# Altium PCB PCB1.PcbDoc
Units mil, origin at the board's own origin, x right, y up, seen from the top; angles counter-clockwise.
Board outline 2000 x 1000 mil, 2 copper layers (Top Layer, Bottom Layer); 27 components, 51 nets, 153 pads, 45 vias.
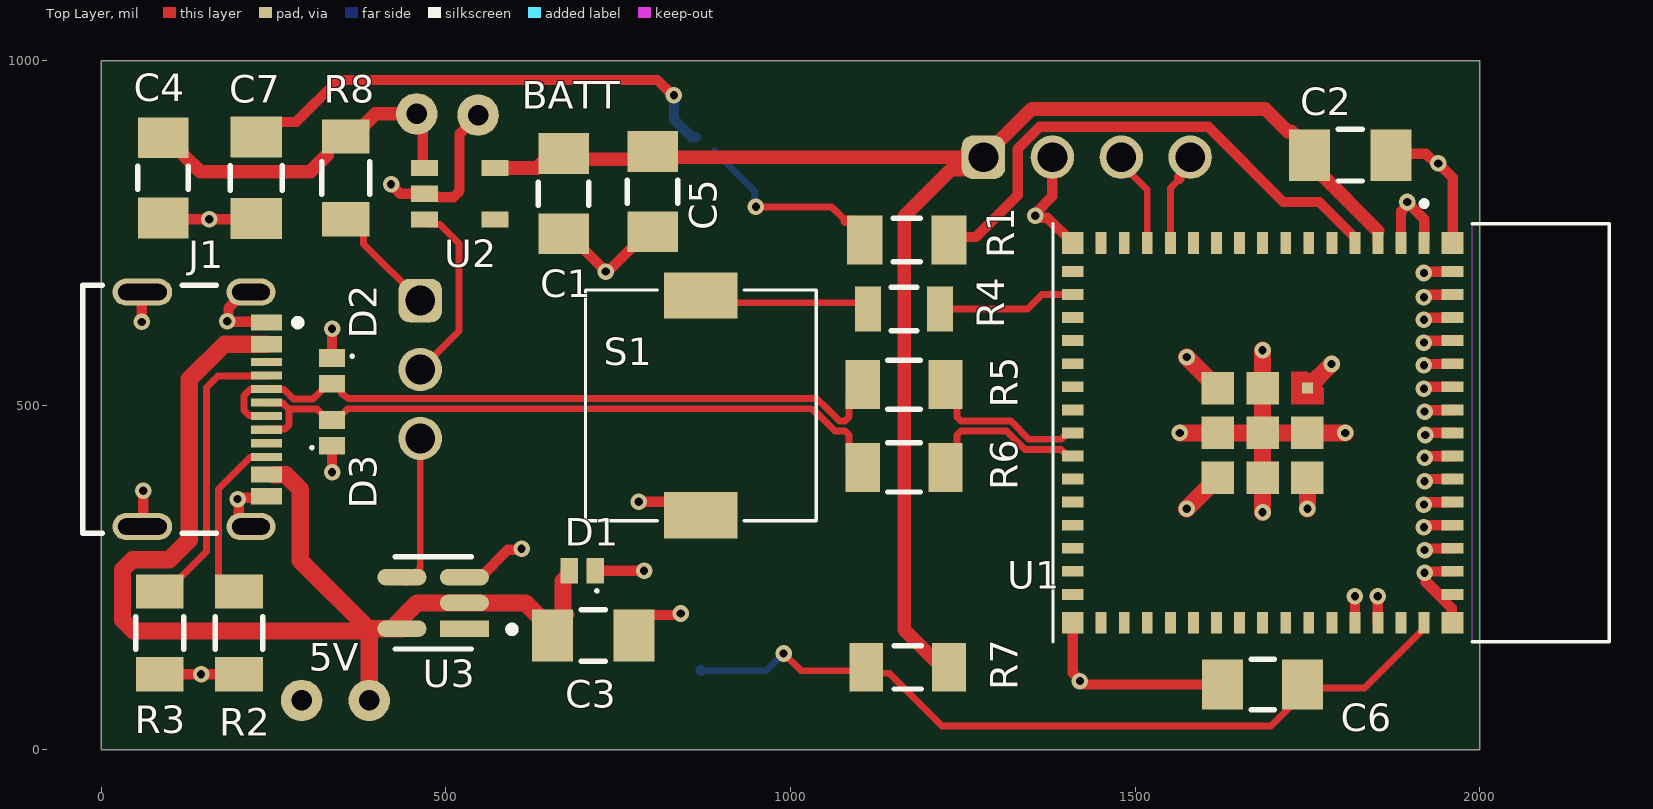
[diagram p0: Top Layer view]
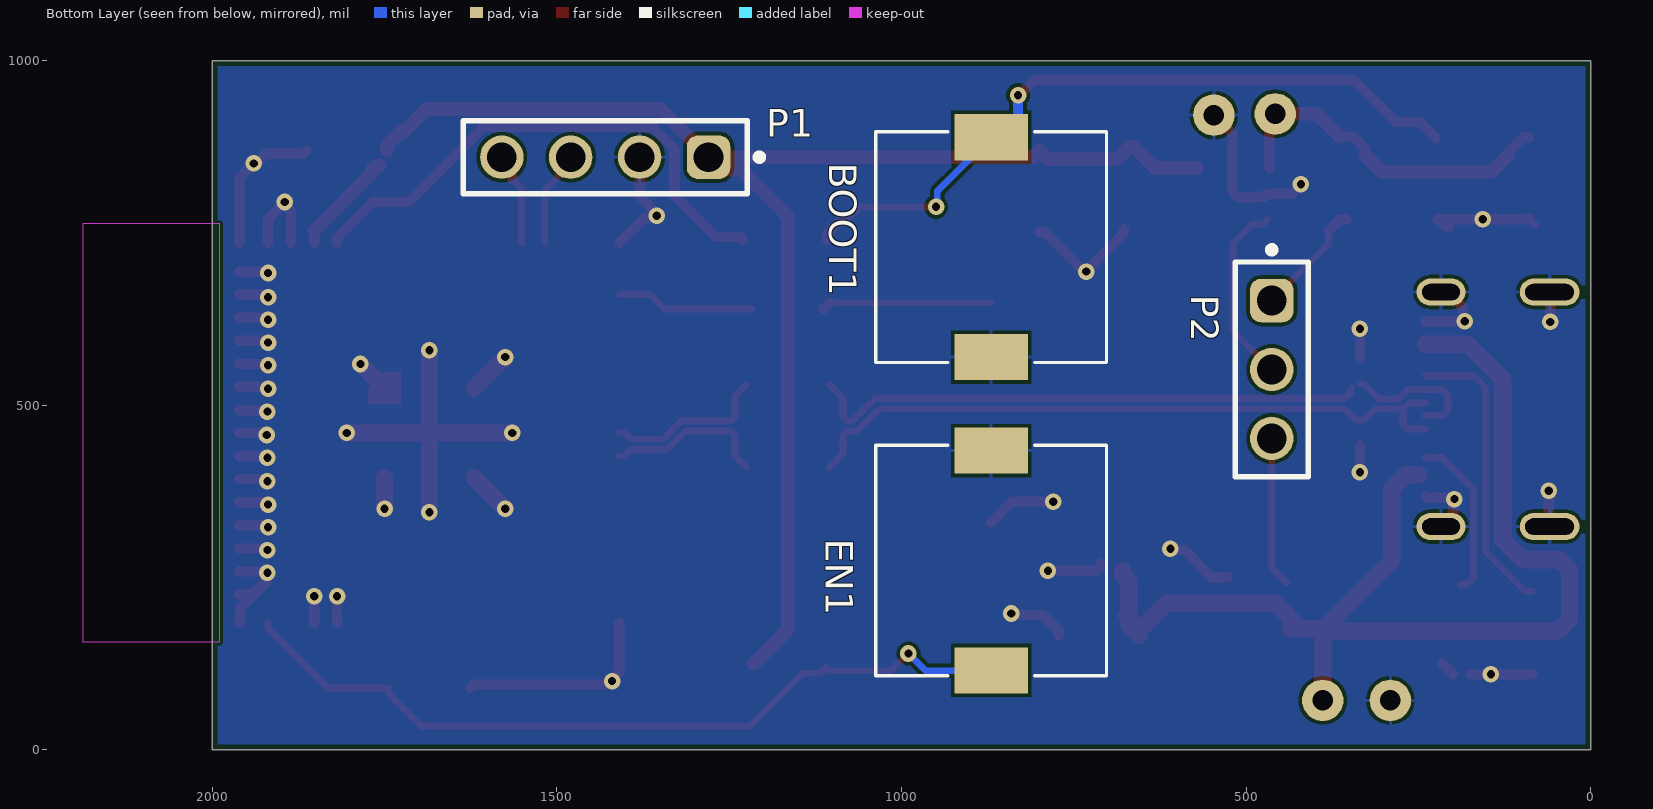
[diagram p1: Bottom Layer view, seen from below]
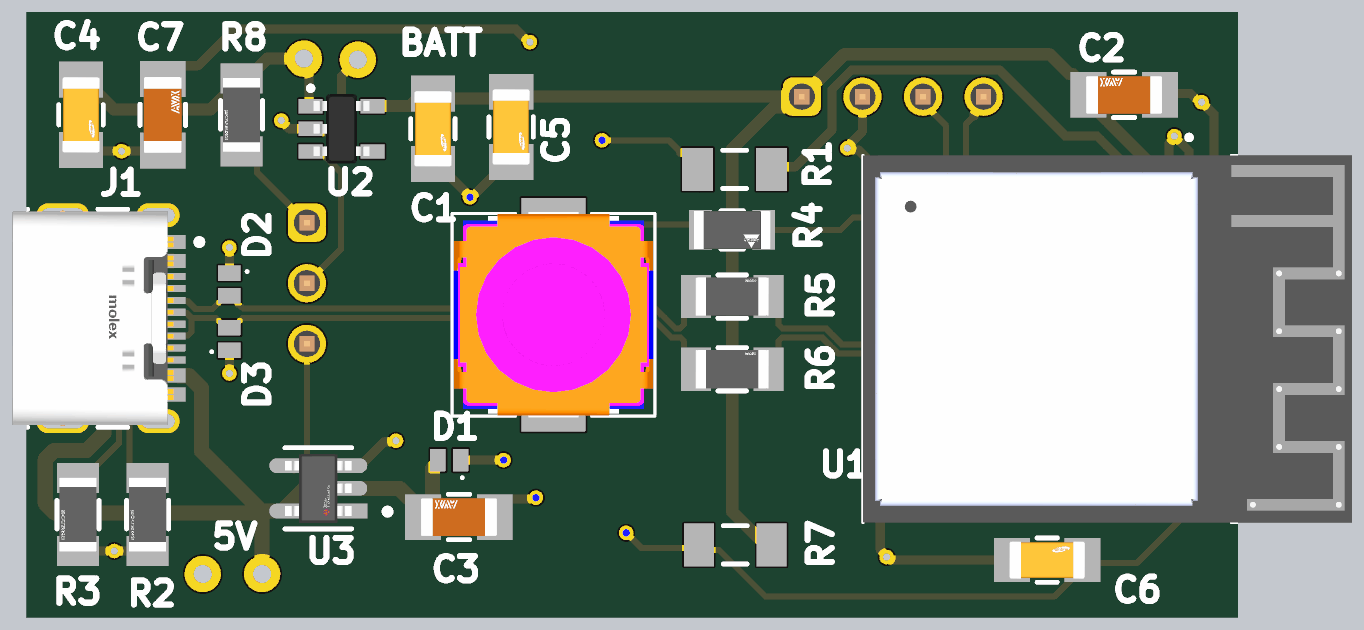
[diagram p2: 3D render of the assembled board from above, using the file's embedded part models]
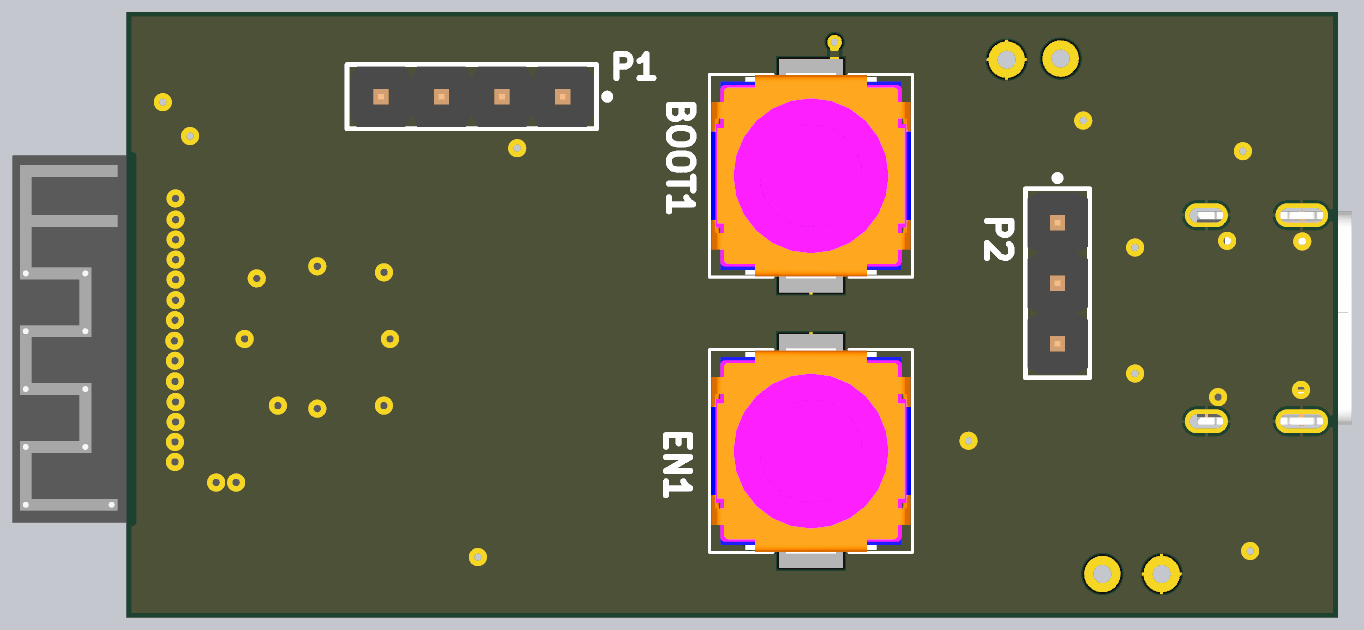
[diagram p3: 3D render of the assembled board from below, using the file's embedded part models]

## Layer stack, top to bottom
Top Solder: solder mask 0.4, Solder Resist, Dk 3.5
Top Layer: signal copper 1.4
Dielectric 1: dielectric 12.6, FR-4, Dk 4.8
Bottom Layer: signal copper 1.4
Bottom Solder: solder mask 0.4, Solder Resist, Dk 3.5

## Board outline
0,0 2000,0 2000,1000 0,1000

## Design rules (kind name [scope] priority, off if disabled: settings)
BoardOutlineClearance [All] p1: gap=7.87 ignorepadtopadclearanceinfootprint=FALSE
Clearance [All] p1: gap=5 ignorepadtopadclearanceinfootprint=FALSE except(9.84: Arc-Hole Track-Hole SMDPad-Hole THPad-Hole Via-Hole Fill-Hole Poly-Hole Region-Hole Text-Hole)
ComponentClearance [All] p1: gap=5 collisioncheckmode=3 verticalgap=5 showdistances=TRUE
DiffPairsRouting [All] p1: maxlimit=10 minlimit=5 mostfreqgap=5 toplayer_minwidth=5 toplayer_maxwidth=1000 toplayer_prefwidth=5 bottomlayer_minwidth=5 bottomlayer_maxwidth=1000 bottomlayer_prefwidth=5 maxuncoupledlength=500
Height [All] p1: minheight=0 maxheight=71497.94 prefheight=500
HoleSize [All] p1: absolutevalues=TRUE maxlimit=248.03 minlimit=11.81 maxpercent=80.000 minpercent=20.000
HoleToHoleClearance [All] p1: gap=9.84 allowstackedmicrovias=FALSE
MinimumAnnularRing [All] p1: minimumring=3
MinimumSolderMaskSliver [All] p1: minsoldermaskwidth=0
PlaneClearance [All] p1: clearance=5
PlaneConnect PlaneConnectPowerPads [InPadClass('PowerPads')] p1: planeconnectstyle=Direct reliefexpansion=20 reliefentries=4 reliefconductorwidth=10 reliefairgap=10
PlaneConnect [All] p2: pad.planeconnectstyle=Relief pad.reliefexpansion=11.81 pad.reliefentries=4 pad.reliefconductorwidth=5 pad.reliefairgap=5 via.planeconnectstyle=Direct via.reliefexpansion=11.81 via.reliefentries=4 via.reliefconductorwidth=5 via.reliefairgap=5
PolygonConnect PolygonConnectPowerPads [All vs (InPadClass('PowerPads'))] p1: connectstyle=Direct reliefconductorwidth=10 reliefentries=4 polygonreliefangle="90 Angle" airgapwidth=10
PolygonConnect [All] p2: thpad.connectstyle=Relief thpad.reliefconductorwidth=5 thpad.reliefentries=4 thpad.polygonreliefangle="90 Angle" thpad.airgapwidth=5 smdpad.connectstyle=Relief smdpad.reliefconductorwidth=5 smdpad.reliefentries=4 smdpad.polygonreliefangle="90 Angle" smdpad.airgapwidth=5 via.connectstyle=Direct via.reliefconductorwidth=5 via.reliefentries=4 via.polygonreliefangle="90 Angle" via.airgapwidth=5
RoutingVias [All] p1: holewidth=11.81 width=23.62 viastyle="Through Hole" minholewidth=11.81 minwidth=23.62 maxholewidth=23.62 maxwidth=259.84
SilkToSilkClearance [All] p1: silktosilkclearance=0
SilkToSolderMaskClearance [IsPad] p1: minsilkscreentomaskgap=5 clearancetoexposedcopper=TRUE
SolderMaskExpansion [All] p1: expansion=2.95 istentingtop=FALSE
SupplyNets "Schematic Supply Nets_3" [InNet('GND')] p1: voltage=0.000
SupplyNets "Schematic Supply Nets_2" [InNet('+3V3')] p2: voltage=0.000
SupplyNets "Schematic Supply Nets_1" [InNet('+5V_VBUS2')] p3: voltage=0.000
SupplyNets "Schematic Supply Nets" [InNet('+BATT')] p4: voltage=0.000
Width [All] p1: maxlimit=1000 minlimit=5 preferedwidth=5 minimp=50.000000 maximp=50.000000 favimp=50.000000
20 further rules are at their usual default settings.

## Classes and differential pairs
differential pair class DIFF90: CON2_USB ESP_USB
differential pair ESP_USB: +ESP_USB_P -ESP_USB_N
differential pair CON2_USB: +CON2_USB_P -CON2_USB_N

## Components (designator, comment, footprint, x,y, rotation, side; value= is the part's Value field where it differs from the comment)
BOOT1 "SKSTACE010" SW_SKSTACE010 870,729.45 r90 bottom
C1 "CL31A106KAHNNNE" FP-CL31-IPC_A 671,807 r270 top
C2 "12065C104JAT2A" FP-1206-L_3_2_0_2-W_1_6_0-IPC_A 1812,863 r180 top
C3 "12065C104JAT2A" FP-1206-L_3_2_0_2-W_1_6_0-IPC_A 713.93,166 r180 top locked
C4 "CL31B105KAHNNNE" FP-CL31-IPC_A 90,830 r270 top value=1µF
C5 "CL31B105KAHNNNE" FP-CL31-IPC_A 800,810 r270 top value=1µF
C6 "CL31B105KAHNNNE" FP-CL31-IPC_A 1685,95 r0 top value=1µF
C7 "12065C104JAT2A" FP-1206-L_3_2_0_2-W_1_6_0-IPC_A 225,830 r90 top
D1 "D5V0X1B2LPQ-7B" DFN70P101X50-2M2 698,260 r180 top
D2 "D5V0X1B2LPQ-7B" DFN70P101X50-2M2 335,550 r270 top
D3 "D5V0X1B2LPQ-7B" DFN70P101X50-2M2 335,460 r90 top
EN1 "SKSTACE010" SW_SKSTACE010 870,275 r270 bottom
J1 "217179-0001" FP-2171790001-MFG 105.16,494.21 r270 top
P1 "61300411121" 61300411121 1430,860 r0 bottom
P2 "61300311121" 61300311121 463,552 r270 bottom
R1 "CRCW120627R0FKEA" RESC3216X60X45ML10T20 1168.98,740 r0 top locked
R2 "CR1206-FX-5101ELF" FP-CR1206-IPC_A 200,170 r270 top
R3 "CR1206-FX-5101ELF" FP-CR1206-IPC_A 85,170 r270 top
R4 "CRCW1206200RFKEA" FP-CRCW1206-e3-IPC_C 1165,640 r0 top
R5 "RC1206JR-070RL" FP-RC1206-IPC_A 1165,530 r0 top value=0Ω
R6 "RC1206JR-070RL" FP-RC1206-IPC_A 1165,410 r0 top value=0Ω
R7 "RC1206FR-0710KL" RESC3116X65X40ML10T20 1170,120 r0 top
R8 "CR1206-FX-5101ELF" FP-CR1206-IPC_A 355,830 r270 top
S1 "SKSTACE010" SW_SKSTACE010 870,500 r90 top
U1 "ESP32-S3-MINI-1-N8" XCVR_ESP32-S3-MINI-1-N8 1685.04,460 r270 top
U2 "XC6220B331MR" SOT23-5 469,807 r270 top
U3 "SN74LV1T04DBVR" FP-DBV0005A-IPC_A 481.71,213.4 r180 top

## Footprints (in the part's own frame and the unit in brackets; to place one, negate y for a bottom-side part, rotate by r counter-clockwise, add the part's x,y. Pads: shape width x height; smd on the part's side, far side on the other; paste and mask are expansions set on the pad)
61300311121 [mm] "Pin Header, pitch 2.54 mm, THT, Vertical, single row, 3p"
  rrect50% 1.6x1.6 hole 1.1: 1(-2.54,0)
  round 1.6 hole 1.1: 2(0,0) 3(2.54,0)
  silkscreen extent -4.53,-1.35 3.96,1.35, body extent -3.81,-1.27 3.81,1.27, height 8.57
61300411121 [mm] "Pin Header, pitch 2.54 mm, THT, Vertical, single row, 4p"
  rrect50% 1.6x1.6 hole 1.1: 1(-3.81,0)
  round 1.6 hole 1.1: 2(-1.27,0) 3(1.27,0) 4(3.81,0)
  silkscreen extent -5.8,-1.35 5.23,1.35, body extent -5.08,-1.27 5.08,1.27, height 8.57
DFN70P101X50-2M2 [mm] "DFN, 2-Leads, Body 0.61x1.01mm, Pitch 0.70mm, IPC Low Density"
  rect 0.65x0.95 smd: 1(-0.475,0) 2(0.475,0)
  silkscreen extent -0.59,0.69 -0.49,0.79, body extent -0.54,-0.34 0.54,0.34, height 0.5
FP-1206-L_3_2_0_2-W_1_6_0-IPC_A [mil]
  rect 59.24x75.05 smd paste+0 mask+0: 1(-59.09,0) 2(59.09,0)
  silkscreen extent -18,-38 18,38, body extent -108,-57 108,57, height 10
FP-2171790001-MFG [mm]
  rect 0.6x1.15 smd paste+0 mask+0: A1B12(-3.2,3.425) A4B9(-2.4,3.425) B1A12(3.2,3.425) B4A9(2.4,3.425)
  rect 0.3x1.15 smd paste+0 mask+0: A5(-1.25,3.425) A6(-0.25,3.425) A7(0.25,3.425) A8(1.25,3.425) B5(1.75,3.425) B6(0.75,3.425) B7(-0.75,3.425) B8(-1.75,3.425)
  rrect100% 1x1.8 hole 1.4 slot 0.6 at 0 deg paste-2539.97 mask+0: S1(-4.32,2.85) S2(4.32,2.85)
  rrect100% 1x2.2 hole 1.8 slot 0.6 at 0 deg paste-2539.97 mask+0: S3(-4.32,-1.15) S4(4.32,-1.15)
  silkscreen extent -4.57,-3.35 4.57,4.7, body extent -4.47,-3.25 4.47,3.5, height 3.36
FP-CL31-IPC_A [mil]
  rect 59.27x73.16 smd paste+0 mask+0: 1(-58.12,0) 2(58.12,0)
  silkscreen extent -17,-37 17,37, body extent -107,-56 107,56, height 10
FP-CR1206-IPC_A [mil]
  rect 49.53x69.38 smd paste+0 mask+0: 1(-60.12,0) 2(60.12,0)
  silkscreen extent -24,-35 24,35, body extent -105,-54 105,54, height 10
FP-CRCW1206-e3-IPC_C [mil]
  rect 37.64x65.28 smd paste+0 mask+0: 1(-52.21,0) 2(52.21,0)
  silkscreen extent -19,-31 19,31, body extent -75,-38 75,38, height 10
FP-DBV0005A-IPC_A [mm]
  rect 1.805x0.612 smd paste+0 mask+0: 1(-1.15,0.95)
  rrect100% 1.805x0.612 smd paste+0 mask+0: 2(-1.15,0) 3(-1.15,-0.95) 4(1.15,-0.95) 5(1.15,0.95)
  silkscreen extent -3.03,-1.7 1.4,1.7, body extent -2.55,-1.95 2.55,1.95, height 0.25
FP-RC1206-IPC_A [mil]
  rect 49.53x71.34 smd paste+0 mask+0: 1(-60.12,0) 2(60.12,0)
  silkscreen extent -24,-36 24,36, body extent -105,-55 105,55, height 10
RESC3116X65X40ML10T20 [mm] "Chip Resistor, 2-Leads, Body 3.10x1.60mm, IPC Low Density"
  rect 1.25x1.8 smd: 1(-1.525,0) 2(1.525,0)
  silkscreen extent -0.5,-0.8 0.5,0.8, body extent -1.6,-0.85 1.6,0.85, height 0.65
RESC3216X60X45ML10T20 [mm] "Chip Resistor, 2-Leads, Body 3.20x1.60mm, IPC Low Density"
  rect 1.3x1.8 smd: 1(-1.55,0) 2(1.55,0)
  silkscreen extent -0.5,-0.8 0.5,0.8, body extent -1.65,-0.85 1.65,0.85, height 0.6
SOT23-5 [mm] "SOT143-4 as used in SP0503BAHTG"
  round 0.4 on Top Overlay: 1(-1.7,0)
  rect 0.6x1 smd: 1(-0.95,0) 2(0,0) 3(0.95,0) 4(0.95,2.6) 5(-0.95,2.6)
  body extent -1.46,0.13 1.46,2.47, height 1
SW_SKSTACE010 [mm]
  rect 1.7x2.7 smd: 1(-4.05,0) 2(4.05,0)
  silkscreen extent -4.25,-4.25 4.25,4.25, body extent -4.3,-4.2 4.3,4.2, height 3.95
XCVR_ESP32-S3-MINI-1-N8 [mm]
  rect 0.8x0.4 smd: 1(-7,5.95) 2(-7,5.1) 3(-7,4.25) 4(-7,3.4) 5(-7,2.55) 6(-7,1.7) 7(-7,0.85) 8(-7,0) 9(-7,-0.85) 10(-7,-1.7) 11(-7,-2.55) 12(-7,-3.4) 13(-7,-4.25) 14(-7,-5.1) 15(-7,-5.95) 31(7,-5.95) 32(7,-5.1) 33(7,-4.25) 34(7,-3.4) 35(7,-2.55) 36(7,-1.7) 37(7,-0.85) 38(7,0) 39(7,0.85) 40(7,1.7) 41(7,2.55) 42(7,3.4) 43(7,4.25) 44(7,5.1) 45(7,5.95)
  rect 0.4x0.8 smd: 16(-5.95,-7) 17(-5.1,-7) 18(-4.25,-7) 19(-3.4,-7) 20(-2.55,-7) 21(-1.7,-7) 22(-0.85,-7) 23(0,-7) 24(0.85,-7) 25(1.7,-7) 26(2.55,-7) 27(3.4,-7) 28(4.25,-7) 29(5.1,-7) 30(5.95,-7) 46(5.95,7) 47(5.1,7) 48(4.25,7) 49(3.4,7) 50(2.55,7) 51(1.7,7) 52(0.85,7) 53(0,7) 54(-0.85,7) 55(-1.7,7) 56(-2.55,7) 57(-3.4,7) 58(-4.25,7) 59(-5.1,7) 60(-5.95,7)
  rect 1.2x1.2 smd: 61(0,0) 67(0,1.65) 68(1.65,1.65) 69(-1.65,0) 70(1.65,0) 71(-1.65,-1.65) 72(0,-1.65) 73(1.65,-1.65)
  rect 0.8x0.8 smd: 62(-7,7) 63(-7,-7) 64(7,-7) 65(7,7)
  rect 0.4x0.4 smd paste-1 mask+0: 66(-1.65,1.65)
  Top Layer region: -1.05,1.05 -2.25,1.05 -2.25,1.65 -1.65,2.25 -1.05,2.25
  Keep-Out Layer region: 7.7,7.725 -7.7,7.725 -7.7,12.775 7.7,12.775
  Keep-Out Layer region: 7.7,7.725 -7.7,7.725 -7.7,12.775 7.7,12.775
  silkscreen extent -8.55,-7.73 7.7,12.78, body extent -7.7,-7.73 7.7,12.78, height 2.55

## Part data
BOOT1 EN1 S1: "Switch Tactile N.O. SPST Round Button J-Bend 0.05A 16VDC 500000Cycles 4N SMD T/R", Package=None, Availability=Unavailable, MP=SKSTACE010, Price=None
C1: library part CMP-2000-06107-2, "Cap Ceramic 10uF 25V X5R ±10% SMD 1206 +85°C Embossed T/R", Capacitance=10uF, Case Code (Imperial)=1206, Case Code (Metric)=3216, Dielectric=X5R, Max Operating Temperature=85°C, Min Operating Temperature=-55°C, Tolerance=10%, Voltage=25V, Case/Package=1206, Contact Plating=Tin, Depth=1.6mm, Height=1.6mm, Lead Free="Lead Free", Length=3.2mm, Material=Ceramic, Mount="Surface Mount", Packaging="Tape and Reel", Radiation Hardening=No, Thickness=0.071inch, Voltage Rating=25V, Voltage Rating (DC)=25V, Width=0.063inch
C2 C3 C7: library part CMP-04427-019132-1, "General Purpose Ceramic Capacitor, 1206, 100nF, 5%, X7R, 15%, 50V", Capacitance=100nF, Case Code (Imperial)=1206, Case Code (Metric)=3216, Dielectric=X7R, Dielectric Material=Ceramic, Insulation Resistance=100GR, Max Operating Temperature=125°C, Min Operating Temperature=-55°C, Package Quantity=4000, Tolerance=5%, Voltage=50V, Case/Package=1206, Contact Plating=Tin, Depth=1.6mm, Dissipation Factor=2.5%, Height=0.5mm, Lead Free="Lead Free", Length=3.2mm, Mount="Surface Mount", Packaging="Cut Tape", Radiation Hardening=No, REACH SVHC="No SVHC", RoHS Compliant=Yes, Series=X7R, Termination=SMD/SMT, Thickness=0.037inch, Voltage Rating=50V, Voltage Rating (DC)=50V, Weight=0.000571oz, Width=1.6mm
C4 C5 C6: library part CMP-001-00086-1, "Ceramic Capacitor, Multilayer, Ceramic, 25V, 10% +Tol, 10% -Tol, X7R, 15% TC, 1uF, Surface Mount, 1206", Capacitor Type=Ceramic, Case/Package=1206, Max Operating Temperature=125°C, Min Operating Temperature=-55°C, Mounting Technology="Surface Mount", Pins=2, RoHS Compliant=Yes
D1 D2 D3: "TVS Diode - ULTRA LOW CAPACITANCE BIDIRECTIONAL"
J1: "CONN RCP USB2.0 TYP C 24P SMD RA", LCSC Part Number=C3197684, Manufacturer=Molex, Supplier Part Number=900-2171790001CT-ND, Category=Connectors, Manufacturer Part Number=217179-0001, Pricing="1=0.9, 10=0.745, 100=0.6212 (USD)", RoHS=No, Stock=7228, Supplier=Digikey
P1: library part CMP-1502-01064-3, Color=Black, Contact Resistance=20mΩ, Current Rating=3A, Max Operating Temperature=105°C, Min Operating Temperature=-40°C, Operating Supply Voltage=250V, Connector Type="Male Pin", Contact Material=Copper, Contact Mating Length=5.9944mm, Contact Plating=Gold, Gender=Male, Height=8.89mm, Lead Free="Lead Free", Lead Pitch=2.54mm, Mount="Through Hole", NexarPartId=32855522, Number of Contacts=4, Number of Pins=4, Number of Positions=4, Number of Rows=1, Orientation=Vertical, Packaging=Bulk, Pitch=2.54mm, REACH SVHC=Unknown, RoHS=Compliant, Termination=Solder, Voltage Rating=250V
P2: library part CMP-1502-01062-3, Color=Black, Contact Resistance=20mΩ, Current Rating=3A, Max Operating Temperature=105°C, Min Operating Temperature=-40°C, Operating Supply Voltage=250V, Connector Type="Male Pin", Contact Material=Copper, Contact Mating Length=5.9944mm, Contact Plating=Gold, Gender=Male, Height=8.94mm, Lead Free="Lead Free", Lead Pitch=2.54mm, Mount="Through Hole", NexarPartId=32855521, Number of Contacts=3, Number of Pins=3, Number of Positions=3, Number of Rows=1, Orientation=Vertical, Packaging=Bulk, Pitch=2.54mm, REACH SVHC=Unknown, RoHS=Compliant, Termination=Solder, Voltage Rating=250V
R1: library part CMP-2003-02015-1, "750mW Thick Film Resistors 200V ±1% ±100ppm/℃ 27Ω 1206 Chip Resistor - Surface Mount ROHS", Manufacturer="Vishay Dale", Resistance=27ohm, Part Number=CRCW120627R0FKEA
R2 R3 R8: library part CMP-07231-005130-1, "Thick Film Chip Resistors 1206 5.1kΩ 0.25W 1% 100ppm/°C", Case Code (Imperial)=1206, Case Code (Metric)=3216, Max Operating Temperature=155°C, Max Power Dissipation=250mW, Min Operating Temperature=-55°C, Package Quantity=1, Resistance=5.1kR, Temperature Coefficient=100ppm/°C, Tolerance=1%, Voltage Rating=200V, Case/Package=1206, Composition="Thick Film", Contact Plating=Tin, Depth=1.6mm, Features="Moisture Resistant", Height=0.03inch, Length=3.2mm, Military Standard=Not, Mount="Surface Mount", Number of Terminations=2, Packaging="Tape and Reel", Power Rating=250mW, Radiation Hardening=No, Termination=SMD/SMT, Thickness=610um, Width=0.063inch
R4: library part CMP-2003-01935-2, "RES Thick Film, 200Ω, 1%, 0.25W, 100ppm/°C, 1206", Case Code (Imperial)=1206, Case Code (Metric)=3216, Max Operating Temperature=155°C, Max Power Dissipation=250mW, Min Operating Temperature=-55°C, Package Quantity=10, Resistance=200R, Temperature Coefficient=100ppm/°C, Tolerance=1%, Voltage Rating=200V, Case/Package=1206, Composition="Thick Film", Contact Plating=Tin, Depth=1.6mm, Features="Automotive AEC-Q200", Height=0.55mm, Lead Free="Lead Free", Length=3.2mm, Military Standard=Not, Number of Pins=2, Number of Terminations=2, Packaging="Tape and Reel", Power Rating=250mW, Radiation Hardening=No, Termination=SMD/SMT, Voltage Rating (DC)=200V, Weight=0.000353oz, Width=1.6mm, Working Voltage=200V
R5 R6: library part CMP-2100-03681-2, "RES SMD 0 OHM JUMPER 1/4W 1206", Manufacturer=YAGEO, Package=RC1206, Power Rating=0.25W, Resistance=0Ω, Temperature="-55°C to +155°C", Temperature Coefficient=300ppm/°C, Temperature Range High=+155°C, Temperature Range Low=-55°C, Tolerance=5%, Voltage Rating=200V, Automotive=No, Category=Res, ComponentLink2Description=Datasheet, ComponentLink2URL=https://www.yageo.com/upload/media/product/productsearch/datasheet/rchip/PYu-RC_Group_51_RoHS_L_10.pdf, Composition="Thick Film", Device Class L1="Passive Components", Device Class L2=Resistors, Device Class L3="Chip SMD Resistors", Digikey Description="RES SMD 0 OHM JUMPER 1/4W 1206", Footprint Url=https://www.yageo.com/upload/website/yageo_PYu-R_Mount_10_19050818_343.pdf, Height=0.65mm, Ipc Land Pattern Name=RESC310160X55, Lead Free=Yes, Manufacturer Part Number=RC1206JR-070RL, Mouser Description="Resistor: thick film; SMD; 1206; 0O; 0.25W; ±5%; -55÷155°C", Octopart=https://octopart.com/rc1206jr-070rl-yageo-40025601, RoHS=TRUE, Series=RC
R7: library part CMP-1014-00623-2, "Chip Resistor, 10 KOhm, +/- 1%, 0.25 W, -55 to 155 degC, 1206 (3216 Metric), RoHS, Tape and Reel", Case Code (Imperial)=1206, Case Code (Metric)=3216, Manufacturer=Yageo, Max Operating Temperature=155degC, Min Operating Temperature=-55degC, Package Description="2-Pin Surface Mount Device, Body 3.1 x 1.6 mm", Package Quantity=5000, Package Reference=1206.0, Power Rating=250mW, Resistance=10KOhm, Temperature Coefficient=100ppm/degreesC, Tolerance=1%, Voltage Rating=200V, Case/Package=1206, Composition=ThickFilm, Datasheet URL=http://www.yageo.com/NewPortal/yageodocoutput?fileName=/pdf/R-Chip/PYu-RC_Group_51_RoHS_L_5.pdf, Datasheet Version="Rev. 5, 10/2016", Depth=1.6mm, Height=0.55mm, Lead Free=LeadFree, Length=3.1mm, Manufacturer URL=http://www.yageo.com/, Military Standard=Not, Packaging=TapeandReel, REACH SVHC=Unknown, RoHSCompliant=true, Termination=SMD/SMT, Width=1.6mm
U1: "SMD Module, ESP32-S3FN8, 8 mb Sp", LCSC Part Number=C2913206, Manufacturer="Espressif Systems", Supplier Part Number=1965-ESP32-S3-MINI-1-N8CT-ND, Category=LDO, Manufacturer Part Number=ESP32-S3-MINI-1-N8, Pricing="1=3.1 (USD)", RoHS=No, Stock=2024, Supplier=Digikey
U2: "LDO - 70dB@(1kHz) 900mA Fixed 3.3V Positive electrode 5.5V SOT-23-5 Voltage Regulators - Linear, Low Drop Out (LDO) Regulators ROHS"
U3: library part CMP-0859-00120-4, "IC INVERTER 1CH 1-INP SOT23-5", Case/Package=SOT-23-5, High Level Output Current=8mA, Max Operating Temperature=125°C, Max Supply Voltage=5.5V, Min Operating Temperature=-40°C, Min Supply Voltage=1.8V, Package Quantity=3000, Quiescent Current=1uA, Lead Free="Lead Free", Logic Function=Inverter, Low Level Output Current=8mA, Mount="Surface Mount", Number of Bits=1, Number of Channels=1, Number of Circuits=1, Number of Inputs=1, Number of Pins=5, Packaging="Tape and Reel", Propagation Delay=7ns, Radiation Hardening=No, REACH SVHC="No SVHC", RoHS Compliant=Yes, Weight=0.001058oz

## Free pads (board coordinates)
  round 60 hole 30: 6(457.91,922.88) 7(547,921) 10(291,72) 11(389,72)

## Via types
v1: diameter 24, hole 12, Top Layer to Bottom Layer, 45 vias

## Nets (pads, with @x,y where several pads share a name; then routed paths per layer and width w, separated by ;. In a path a pad name is that pad's centre, name@x,y a point inside that pad or via, vN(x,y) a via of type N, cw(c..) or ccw(c..) an arc to the next point about the centre after c; other vN are vias at no path point)
+3V3: C1.1 C2.2 C5.1 P1.1 R7.2 U1.3 U2.5 | length 2255.8
  Top Layer w15: P1.1@1256.63,860 1260.68,855.95 P1.1@1260.68,847.2 ; 1851.99,753.05 1851.99,735.96 U1.3
  Top Layer w20: U2.5 632.41,844.4 662.1,874.09 670,874.09 687.09,857 787.94,857 800,869.06 809.06,860 1256.63,860 1270.94,860 P1.1 ; R7.2@1215,125 1165,175 1165,774 1233.05,842.05 1258.94,842.05 1260.68,843.79 P1.1@1260.68,847.2 ; P1.1@1256.63,869.06 1270.94,869.06 P1.1 ; C2.2@1746.93,870 1746.93,876.89 1726.42,897.4 1721.42,897.4 1688.82,930 1350,930 P1.1 ; C2.2@1756.93,848.11 1761.93,848.11 1767.44,842.6 1767.44,837.6 1851.99,753.05
+5V_VBUS2: C3.2 D1.2 J1.A4B9 J1.B4A9 pad.11 U3.2 U3.5 | length 1754.6
  Top Layer w15: C3.2@655.86,166 C3.2@655.86,172.89 ; C3.2@666.56,183.59 670,187.03 C3.2@679.3,196.33
  Top Layer w25: J1.A4B9 178.95,588.7 128,537.75 128,305 99,276 45.64,276 31,261.36 31,189 47.26,172.74 386.87,172.74 ; J1.B4A9@250.14,399.4 268.03,399.4 289,378.43 289,274.74 389,174.74 ; pad.11 389,174.74 ; U3.5 U3.5@421.34,176 ; C3.2@655.86,166 670,180.14 670,187.03 670,244.8 679,253.8 679,259.7 D1.2 ; C3.2@655.86,172.89 615.35,213.4 U3.2 458.74,213.4 U3.5@421.34,176 ; 389,174.74 390.26,176 U3.5@421.34,176
+BATT: C4.1 pad.6 R8.1 U2.1@469,844.4 | length 513.7
  Top Layer w15: C4.1@90,889.06 97.87,889.06 119.9,867.03 C4.1@119.9,862.79 ; 327.81,862.93 327.81,872.85 345.08,890.12 R8.1 R8.1@364.92,890.12 ; pad.6 466.52,914.27 U2.1@466.52,844.4
  Top Layer w20: C4.1@119.9,862.79 143.69,839 303.88,839 327.81,862.93 ; R8.1@364.92,890.12 397.72,922.92 406.01,922.92 414.29,922.92 pad.6
BTN_GPIO0: BOOT1.2 C7.2 R1.1 | length 1016.6
  Top Layer w10: v1(950,788) 1059.95,788 1080.02,767.93
  Top Layer w15: C7.2@225,888.07 248.01,911.08 283.08,911.08 344,972 807,972 v1@830,949 ; 1080.02,767.93 1089.86,767.93 1107.95,749.84 R1.1
  Bottom Layer w10: BOOT1.2@889.68,868.9 948.28,810.3 v1@948.28,789.72
  Bottom Layer w15: v1(831,950) 831,914.86 856.96,888.9 BOOT1.2@862.96,888.9 ; v1@948.28,789.72 v1(950,788)
CHIP_PU: C6.2 EN1.2 R7.1 U1.45 | length 1171.6
  Top Layer w10: v1(990,140) 1015,115 R7.1@1104.96,115 ; R7.1 1118.67,111.29 1143.71,111.29 1220,35 1696.93,35 1744.06,82.13 1744.06,90 1832.76,90 1919.29,176.54 U1.45
  Bottom Layer w10: EN1.2@870.55,115 965,115 v1(990,140)
  Bottom Layer w15: EN1.2 EN1.2@870.55,115
CON2_USB_N: D2.2 J1.A7 J1.B7 R5.1 | length 1021.8
  Top Layer w10: J1.A7 239.09,485.28 214.72,485.28 207.36,492.64 207.36,514.1 216.09,522.83 239.09,522.83 J1.B7 240.91,522.83 265.43,522.83 278.85,509.42 307.21,509.42 329.09,531.3 D2.2 ; D2.2@347.2,525 348.7,523.5 348.7,517.2 358.9,510 1037.99,510 1053.28,495.18 cw(c1035.89,477.22) 1053.52,494.96 cw(c1042.96,484.3) 1053.57,494.91 1070.97,477.5 1079.26,477.5 1085.12,483.36 1085.12,510.23 R5.1
CON2_USB_P: D3.2 J1.A6 J1.B6 R6.1 | length 990.9
  Top Layer w10: J1.B6 240.91,465.59 266.78,465.59 272.64,471.45 272.64,494.42 ; J1.A6 240.91,503.15 263.91,503.15 267.06,500 272.64,494.42 ; R6.1 1085.12,429.77 1085.12,456.64 1079.26,462.5 1064.76,462.5 1042.96,484.3 ccw(c1035.89,477.22) 1042.85,484.41 1039.18,487.96 1030.08,495 357.2,495 340.91,478.7 329.09,478.7 313.38,494.42 272.64,494.42
ESP_USB_N: R5.2 U1.23 | length 238.9
  Top Layer w10: R5.2 1241.65,513.46 1241.65,483.36 1247.51,477.5 1319.68,477.5 1346.42,450.77 1392.84,450.77 1398.7,456.63 1398.7,457.13 1401.57,460 U1.23
ESP_USB_P: R6.2 U1.24 | length 238.9
  Top Layer w10: R6.2 1241.65,426.54 1241.65,456.64 1247.51,462.5 1313.47,462.5 1340.2,435.77 1392.84,435.77 1398.7,429.91 1398.7,429.41 1401.57,426.54 U1.24
GND: BOOT1.1 C1.2 C2.1 C3.1 C4.2 C5.2 C6.1 C7.1 D1.1 D2.1 D3.1 EN1.1 J1.A1B12 J1.B1A12 J1.S1 J1.S2 J1.S3 J1.S4 P1.2 pad.7 pad.10 R2.2 R3.2 S1.1 U1.1 U1.2 U1.42 U1.43 U1.46 U1.47 U1.48 U1.49 U1.50 U1.51 U1.52 U1.53 U1.54 U1.55 U1.56 U1.57 U1.58 U1.59 U1.60 U1.61 U1.62 U1.63 U1.64 U1.65 U1.66 U1.67 U1.68 U1.69 U1.70 U1.71 U1.72 U1.73 U2.2 U3.3 | length 3812.3
  Top Layer w10: C4.2@80,760.94 90,770.94 C4.2@97.87,770.94 ; C7.1@212.48,759.41 223.07,770 C7.1@225,771.93
  Top Layer w15: v1(59,621) 59,663.41 J1.S3 ; J1.S4 61,325.25 v1(61,376) ; R3.2 85.12,110 v1(145,110) R2.2@175.02,110 ; C4.2@90,770.94 90.94,770 v1(157,770) C7.1@223.07,770 ; R2.2 R2.2@215,124.88 ; C7.1@205.59,759.41 C7.1@212.48,759.41 ; J1.S2 210.98,324.13 199.72,335.39 199.72,362.28 v1(198,364) 199.72,365.72 237.49,365.72 J1.B1A12 ; J1.S1 208.21,664.29 184.72,640.8 184.72,623.72 v1(183,622) 183.9,621.1 239.1,621.1 J1.A1B12 ; v1(335,403) D3.1 ; D2.1 v1(335,611) ; v1(420.6,820.6) 434.2,807 U2.2 473.31,802.69 489.36,802.69 489.97,802.08 511.21,802.08 520,810.86 520,894 pad.7 ; U3.3 550.49,250.8 589.96,290.28 608.28,290.28 v1(610,292) ; pad.7@559,925.71 pad.7@559,937.88 ; C1.2@677.9,755.91 677.9,748.91 729.88,696.94 v1@734.94,696.94 ; D1.1@711.41,270 711.41,265.3 D1.1 v1(787.7,260) ; v1(732,694) 733.72,695.72 736.9,695.72 792.13,750.94 C5.2@800,750.94 ; C3.1@772,166 772,172.89 795.01,195.9 836.47,195.9 838.56,198 v1(841,198) ; v1(780,360) 840,360 S1.1@870,330 ; P1.2 1380,803.03 1355,778.03 v1(1355,775) 1357.87,772.13 1372.91,772.13 U1.63 ; U1.64 1409.45,111.9 1420,101.35 v1(1420,100) 1421.35,100 1426.35,95 1620.94,95 C6.1@1625.94,90 ; U1.42 1818.95,184.46 1818.95,222.95 v1(1819,223) ; v1(1852,223) 1852.18,222.82 1852.18,184.59 U1.43 ; C2.1@1863.07,870 1868.07,865 1921.88,865 1935.94,850.94 v1(1940,850.94) 1960.63,830.31 U1.62 ; U1.2 1885.83,781.77 1895,790.94 v1@1895,794.34 ; v1(1895,795) v1@1895,794.34 ; v1(1919,323) 1921.44,323 1924.51,326.07 U1.49 U1.49 ; v1(1919,356) 1921.44,356 1924.67,359.23 1960.26,359.23 U1.50 ; v1(1919,524) 1921.44,524 1924.4,526.96 1960.59,526.96 U1.55 ; v1(1919,558) 1921.44,558 1923.46,560.02 1960.26,560.02 U1.56 ; v1(1919,591) 1921.44,591 1923.92,593.48 1960.26,593.48 U1.57 ; v1(1919,624) 1921.44,624 1924.38,626.95 1960.26,626.95 U1.58 ; v1(1919,657) 1921.44,657 1924.85,660.41 1960.26,660.41 U1.59 ; v1(1919,692) 1921.44,692 1923.31,693.88 1960.26,693.88 U1.60 ; U1.1 1919.29,770.05 v1@1895,794.34 ; v1(1920,290) 1922.44,290 1924.74,292.3 1960.26,292.3 U1.48 ; v1(1920,390) 1922.44,390 1925.47,393.04 1960.59,393.04 U1.51 ; v1(1920,424) 1922.44,424 1924.6,426.16 1960.26,426.16 U1.52 ; v1(1920,491) 1922.44,491 1924.53,493.09 1960.26,493.09 U1.54 ; v1(1921,457) 1923.44,457 1926.44,460 U1.53 ; U1.65 1959.48,185.56 1959.48,205.61 1940.3,224.79 1921.72,243.37 v1@1921.72,255.28 ; U1.46 1941.25,225.75 1921.72,245.28 v1@1921.72,255.28 ; U1.47 1960.26,258.84 1931.1,258.84 1924.27,258.84 1922.44,257 v1(1920,257) ; v1(1920,257) v1@1921.72,255.28 ; v1(1920,257) v1@1921.72,255.28 ; v1(1920,257) v1@1921.72,255.28
  Top Layer w25: v1(1565,460) U1.72 U1.61 ; v1(1575,350) U1.73 ; v1(1575,570) U1.71 ; v1(1685,345) U1.70 ; U1.69 v1(1685,580) ; U1.70 U1.61 ; U1.69 U1.61 ; 1740,520 1745.04,520 U1.66 v1(1785,560) ; v1(1750,350) U1.68 ; v1(1805,460) U1.67 U1.61
GPIO0: R1.2 U1.4 | length 770.6
  Top Layer w15: R1.2 1234.3,744.3 1269.3,744.3 1329.73,804.73 1329.73,871.95 1361.78,904 1606,904 1715,795 1767.36,795 1818.9,743.46 U1.4
GPIO1: U1.5
GPIO2: U1.6
GPIO3: U1.7
GPIO4: U1.8
GPIO5: U1.9
GPIO6: U1.10
GPIO7: U1.11
GPIO8: P1.4 U1.12 | length 136.3
  Top Layer w10: U1.12 1551.18,815.17 1564.32,828.31
  Top Layer w15: 1564.32,828.31 1564.32,831.33 1580,847.01 P1.4
GPIO9: P1.3 U1.13 | length 140
  Top Layer w10: P1.3@1480,850 1517.72,812.28 U1.13
  Top Layer w15: P1.3@1480,850 P1.3
GPIO10: U1.14
GPIO11: U1.15
GPIO12: U1.16
GPIO13: R4.2 U1.17 | length 200.9
  Top Layer w10: R4.2 1344,640 1364.79,660.79 U1.17
GPIO14: U1.18
GPIO15: U1.19
GPIO16: U1.20
GPIO17: U1.21
GPIO18: U1.22
GPIO21: U1.25
GPIO26: U1.26
GPIO33: U1.28
GPIO34: U1.29
GPIO35: U1.31
GPIO36: U1.32
GPIO37: U1.33
GPIO38: U1.34
GPIO39: U1.35
GPIO40: U1.36
GPIO41: U1.37
GPIO42: U1.38
GPIO45: U1.41
GPIO46: U1.44
GPIO47: U1.27
GPIO48: U1.30
NetJ1_A5: J1.A5 R3.1 | length 424.1
  Top Layer w10: R3.1 94.92,230.12 153,288.2 153,526 169.52,542.52 239.09,542.52 J1.A5
NetJ1_B5: J1.B5 R2.1 | length 241.6
  Top Layer w10: R2.1@190,240 180.2,240 170.31,249.88 170.31,378.63 216.09,424.41 239.09,424.41 J1.B5
NetP2_1: P2.1 R8.2 | length 167.6
  Top Layer w10: R8.2@380.7,752.62 380.7,734.3 P2.1
  Top Layer w15: R8.2 363.43,769.88 R8.2@380.7,752.62
NetP2_2: P2.2 U2.3 | length 270.5
  Top Layer w10: P2.2 519,608 519,735 491.21,762.79 475.81,762.79 U2.3
NetP2_3: P2.3 U3.4 | length 218.2
  Top Layer w10: U3.4@441.62,242.62 463,264 P2.3
NetR4_1: R4.1 S1.2 | length 246.5
  Top Layer w10: S1.2@870,648.9 R4.1@1103.89,648.9
  Top Layer w15: R4.1@1103.89,648.9 R4.1
pads on no net: J1.A8 J1.B8 U1.39 U1.40 U2.1@469,873.93 U2.4 U3.1

## Polygon pours and split planes (outlines as drawn)
GND on Bottom Layer "GND_L02_P000" (solid, pour order 0): -1,1000 2000,1000 2000,0 0,0

## Silkscreen, mask and mechanical layers (free items; w line width, h text height)
Top Overlay:
  text "BATT" at 610,930 h40
  text "5V" at 301,115 h40